# EAGLE board Wiz810mjMikroBUS_SIL3 (EAGLE 6.4)
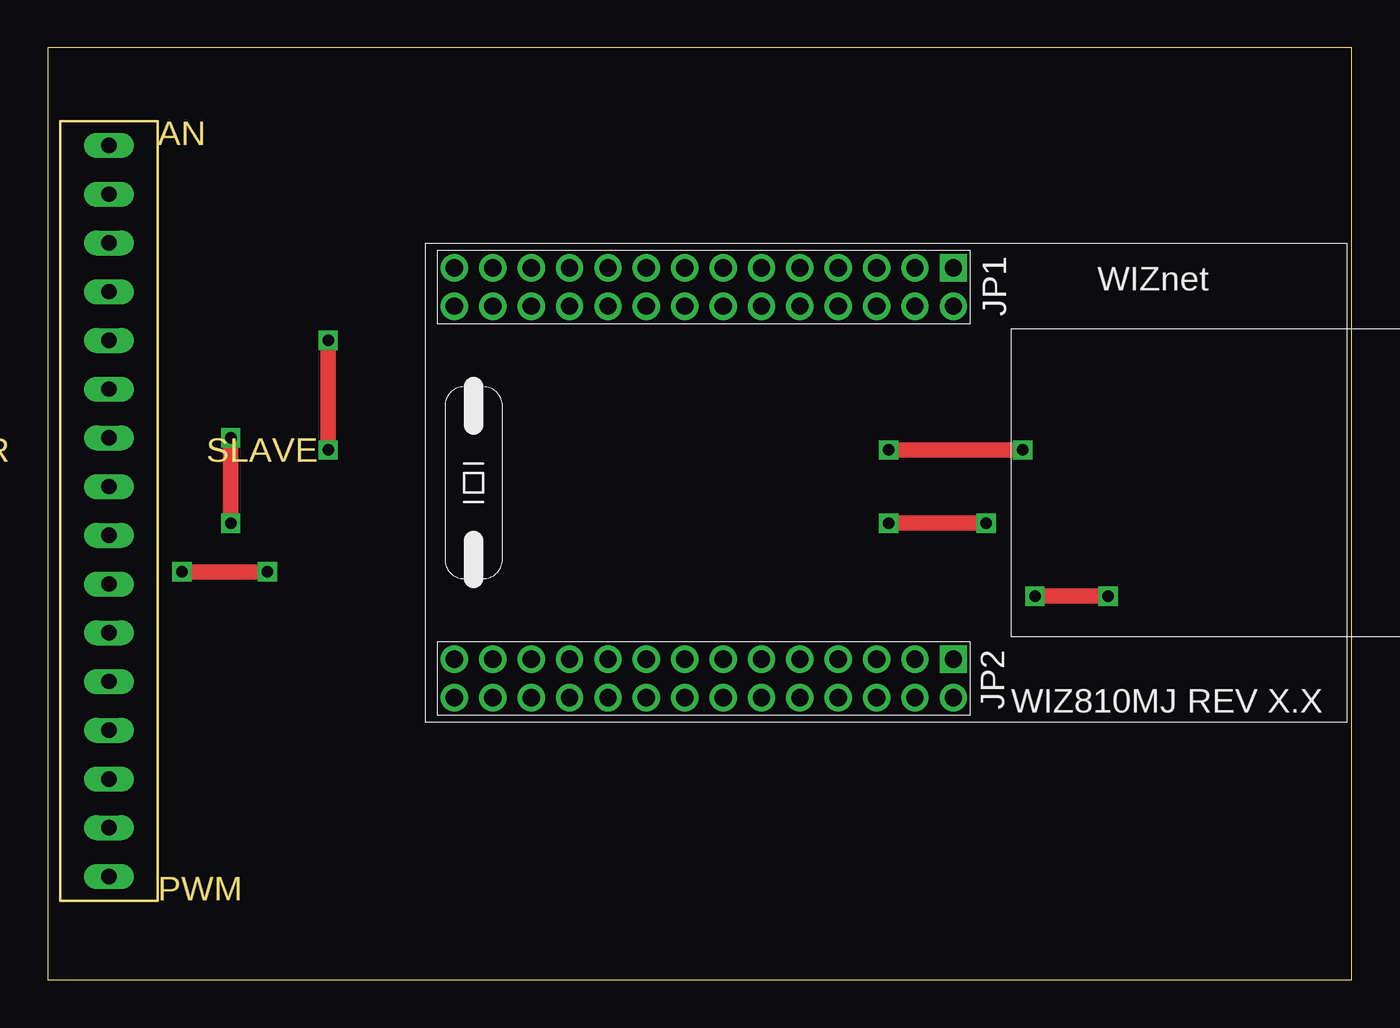
[diagram p0: board, top side]
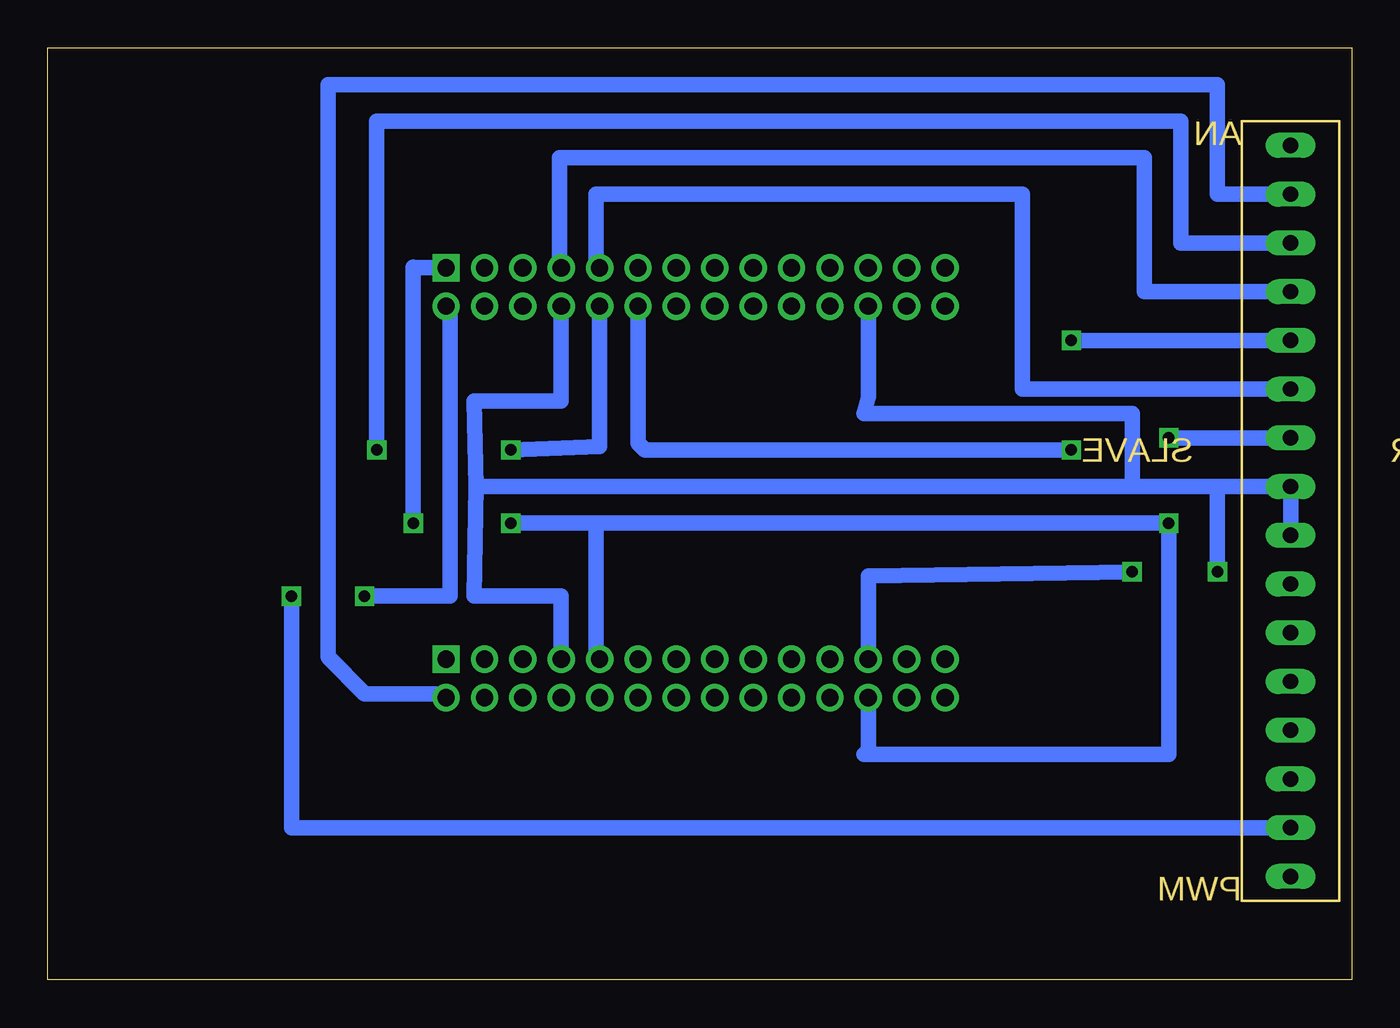
[diagram p1: board, bottom side, seen from below]

Size 67.94 x 48.56 mm. Coordinates in mm from the lower left corner, seen from the top.
Outline: 0,48.56 0,0 67.94,0 67.94,48.56 0,48.56
Copper layers (1*16): Top 0.035mm / dielectric 1.5mm / Bottom 0.035mm
Design rules "default": minimum track width 10mil, minimum drill 24mil, track to track 8mil, track to pad 8mil, pad to pad 8mil, via to via 8mil, smd to smd 8mil, copper to edge 40mil, drill to drill 8mil, minimum pad ring 10mil, minimum via ring 8mil, stop-mask expansion 4mil, vias tented up to drill 0mil, thermal gap 10mil

## Footprints (pad centres in the part's own frame; a part is rotated, then mirrored left to right if it is on the bottom)
WIZ810MJ = drill 0.9 pad 1.422 square: 1 27.5,-1.3; 29 27.5,-21.7 | drill 0.9 pad 1.422: 2 27.5,-3.3; 3 25.5,-1.3; 4 25.5,-3.3; 5 23.5,-1.3; 6 23.5,-3.3; 7 21.5,-1.3; 8 21.5,-3.3; 9 19.5,-1.3; 10 19.5,-3.3; 11 17.5,-1.3; 12 17.5,-3.3; 13 15.5,-1.3; 14 15.5,-3.3; 15 13.5,-1.3; 16 13.5,-3.3; 17 11.5,-1.3; 18 11.5,-3.3; 19 9.5,-1.3; 20 9.5,-3.3; 21 7.5,-1.3; 22 7.5,-3.3; 23 5.5,-1.3; 24 5.5,-3.3; 25 3.5,-1.3; 26 3.5,-3.3; 27 1.5,-1.3; 28 1.5,-3.3; 30 27.5,-23.7; 31 25.5,-21.7; 32 25.5,-23.7; 33 23.5,-21.7; 34 23.5,-23.7; 35 21.5,-21.7; 36 21.5,-23.7; 37 19.5,-21.7; 38 19.5,-23.7; 39 17.5,-21.7; 40 17.5,-23.7; 41 15.5,-21.7; 42 15.5,-23.7; 43 13.5,-21.7; 44 13.5,-23.7; 45 11.5,-21.7; 46 11.5,-23.7; 47 9.5,-21.7; 48 9.5,-23.7; 49 7.5,-21.7; 50 7.5,-23.7; 51 5.5,-21.7; 52 5.5,-23.7; 53 3.5,-21.7; 54 3.5,-23.7; 55 1.5,-21.7; 56 1.5,-23.7
MIKROBUS_SIL = drill 0.8 long: +3.3V 0,2.54; +5V 0,-5.08; AN 0,17.78; CS 0,12.7; GND 0,0; GND2 0,-2.54; INT 0,-17.78; MISO 0,7.62; MOSI 0,5.08; PWM 0,-20.32; RST 0,15.24; RX 0,-15.24; SCK 0,10.16; SCL 0,-10.16; SDA 0,-7.62; TX 0,-12.7

## Placement (x,y rotation side)
U$1  WIZ810MJ  [WIZ810MJ]  19.69,38.41 0 top
U$2  [MIKROBUS_SIL]  3.18,25.7 0 top

## Library data of the parts
U$1 = WIZNET
U$2 = lieven

## Nets
N$1: U$1.2 U$2.INT
N$4: U$1.30 U$2.RST
N$5: U$1.10 U$2.CS
N$6: U$1.7 U$2.SCK
N$7: U$1.12 U$2.MISO
N$8: U$1.9 U$2.MOSI
N$9: U$1.1 U$1.37 U$1.52 U$2.+3.3V
N$27: U$1.8 U$1.24 U$1.35 U$1.51 U$2.GND U$2.GND2

## Tracks (layer width: path | path; a pad name or v marks a point on that pad's centre or on a via)
N$1  (via drill 0.6)
  Top 0.813: v55.25,19.99 v51.44,19.99
  Bottom 0.813: U$2.INT 55.25,7.93 v55.25,19.99 | v51.44,19.99 46.99,19.99 46.99,34.91 U$1.2
N$4
  Bottom 0.813: U$2.RST 6.98,40.95 6.98,46.66 53.34,46.66 53.34,16.81 51.44,14.91 47.39,14.91 U$1.30
N$5  (via drill 0.6)
  Top 0.813: v43.81,27.61 v50.8,27.61
  Bottom 0.813: U$2.CS 8.89,38.41 8.89,44.75 50.8,44.75 v50.8,27.61 | U$1.10 39.19,27.8 v43.81,27.61
N$6
  Bottom 0.813: U$2.SCK 10.8,35.86 10.8,42.85 41.28,42.85 41.28,37.2 U$1.7
N$7  (via drill 0.6)
  Top 0.813: v14.61,27.61 v14.61,33.32
  Bottom 0.813: U$1.12 37.19,27.96 36.83,27.61 v14.61,27.61 | v14.61,33.32 U$2.MISO
N$8
  Bottom 0.813: U$2.MOSI 17.15,30.78 17.15,40.95 39.37,40.95 39.37,37.29 U$1.9
N$9  (via drill 0.6)
  Top 0.813: v9.52,23.8 v9.52,28.24 | v48.89,23.8 v43.81,23.8
  Bottom 0.813: U$1.52 25.19,11.95 25.4,11.74 9.52,11.74 v9.52,23.8 39.37,23.8 | v9.52,28.24 U$2.+3.3V | U$1.37 39.26,16.7 39.37,16.81 39.37,23.8 | U$1.1 48.86,37.1 48.89,37.13 v48.89,23.8 | v43.81,23.8 39.37,23.8
N$27  (via drill 0.6)
  Top 0.813: v11.43,21.26 v6.98,21.26
  Bottom 0.813: U$1.8 41.19,30.15 45.72,30.15 45.63,25.7 | 45.63,25.7 45.72,19.99 41.19,19.99 U$1.35 | 6.98,25.7 U$2.GND U$2.GND2 | v6.98,21.26 6.98,25.7 | 11.43,25.7 45.63,25.7 | U$1.24 25.19,30.36 25.4,29.52 11.43,29.52 11.43,25.7 | 11.43,25.7 6.98,25.7 | U$1.51 25.19,21.05 v11.43,21.26